# Altium PCB TrabajoTecnologiaCarlos.PcbDoc
Units mm, origin at the board's own origin, x right, y up, seen from the top; angles counter-clockwise.
Board outline 46.58 x 52.42 mm, 2 copper layers (Top Layer, Bottom Layer), stack 1.571 mm thick; 31 components, 35 nets, 105 pads, 0 vias.
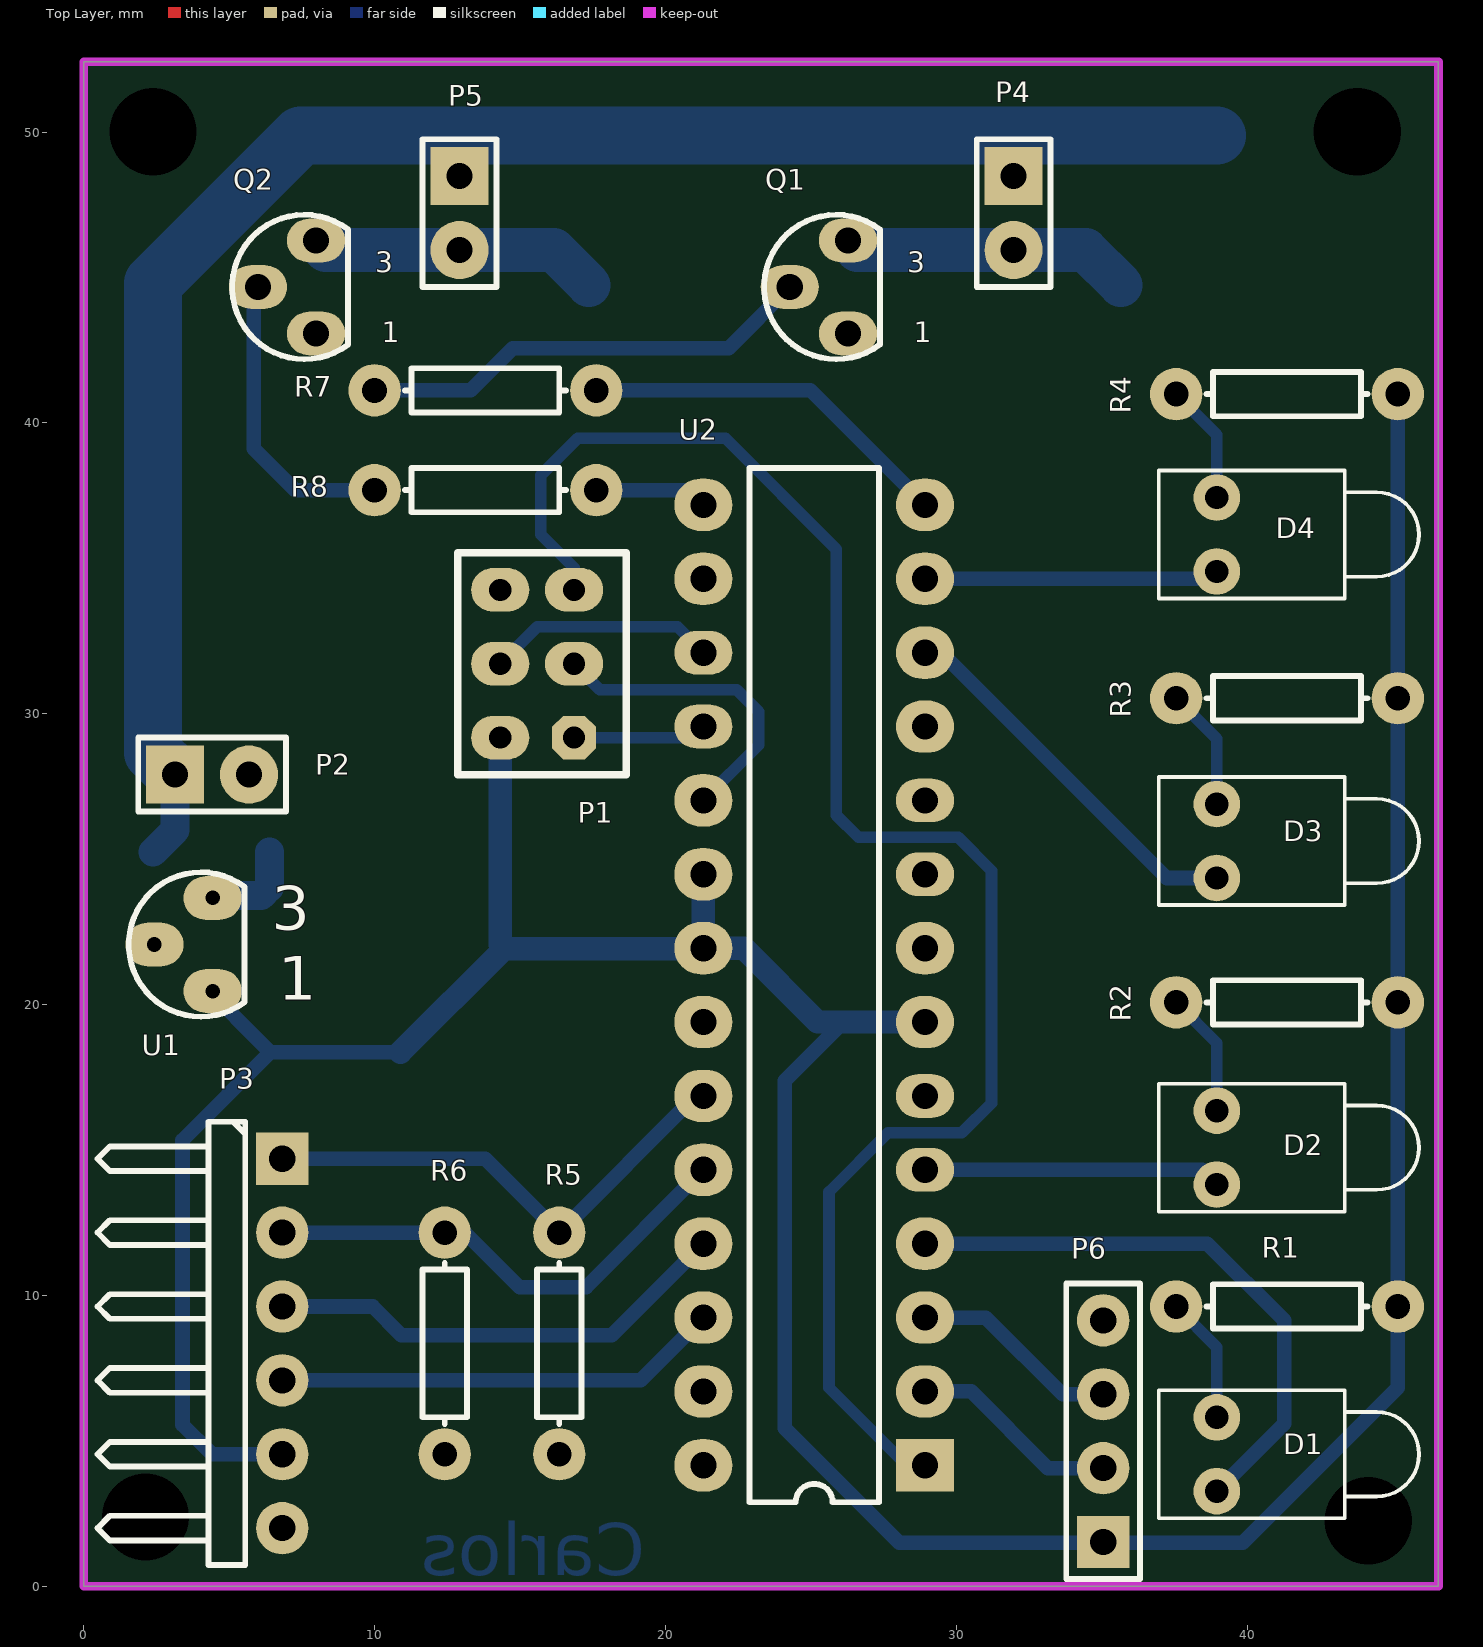
[diagram p0: Top Layer view]
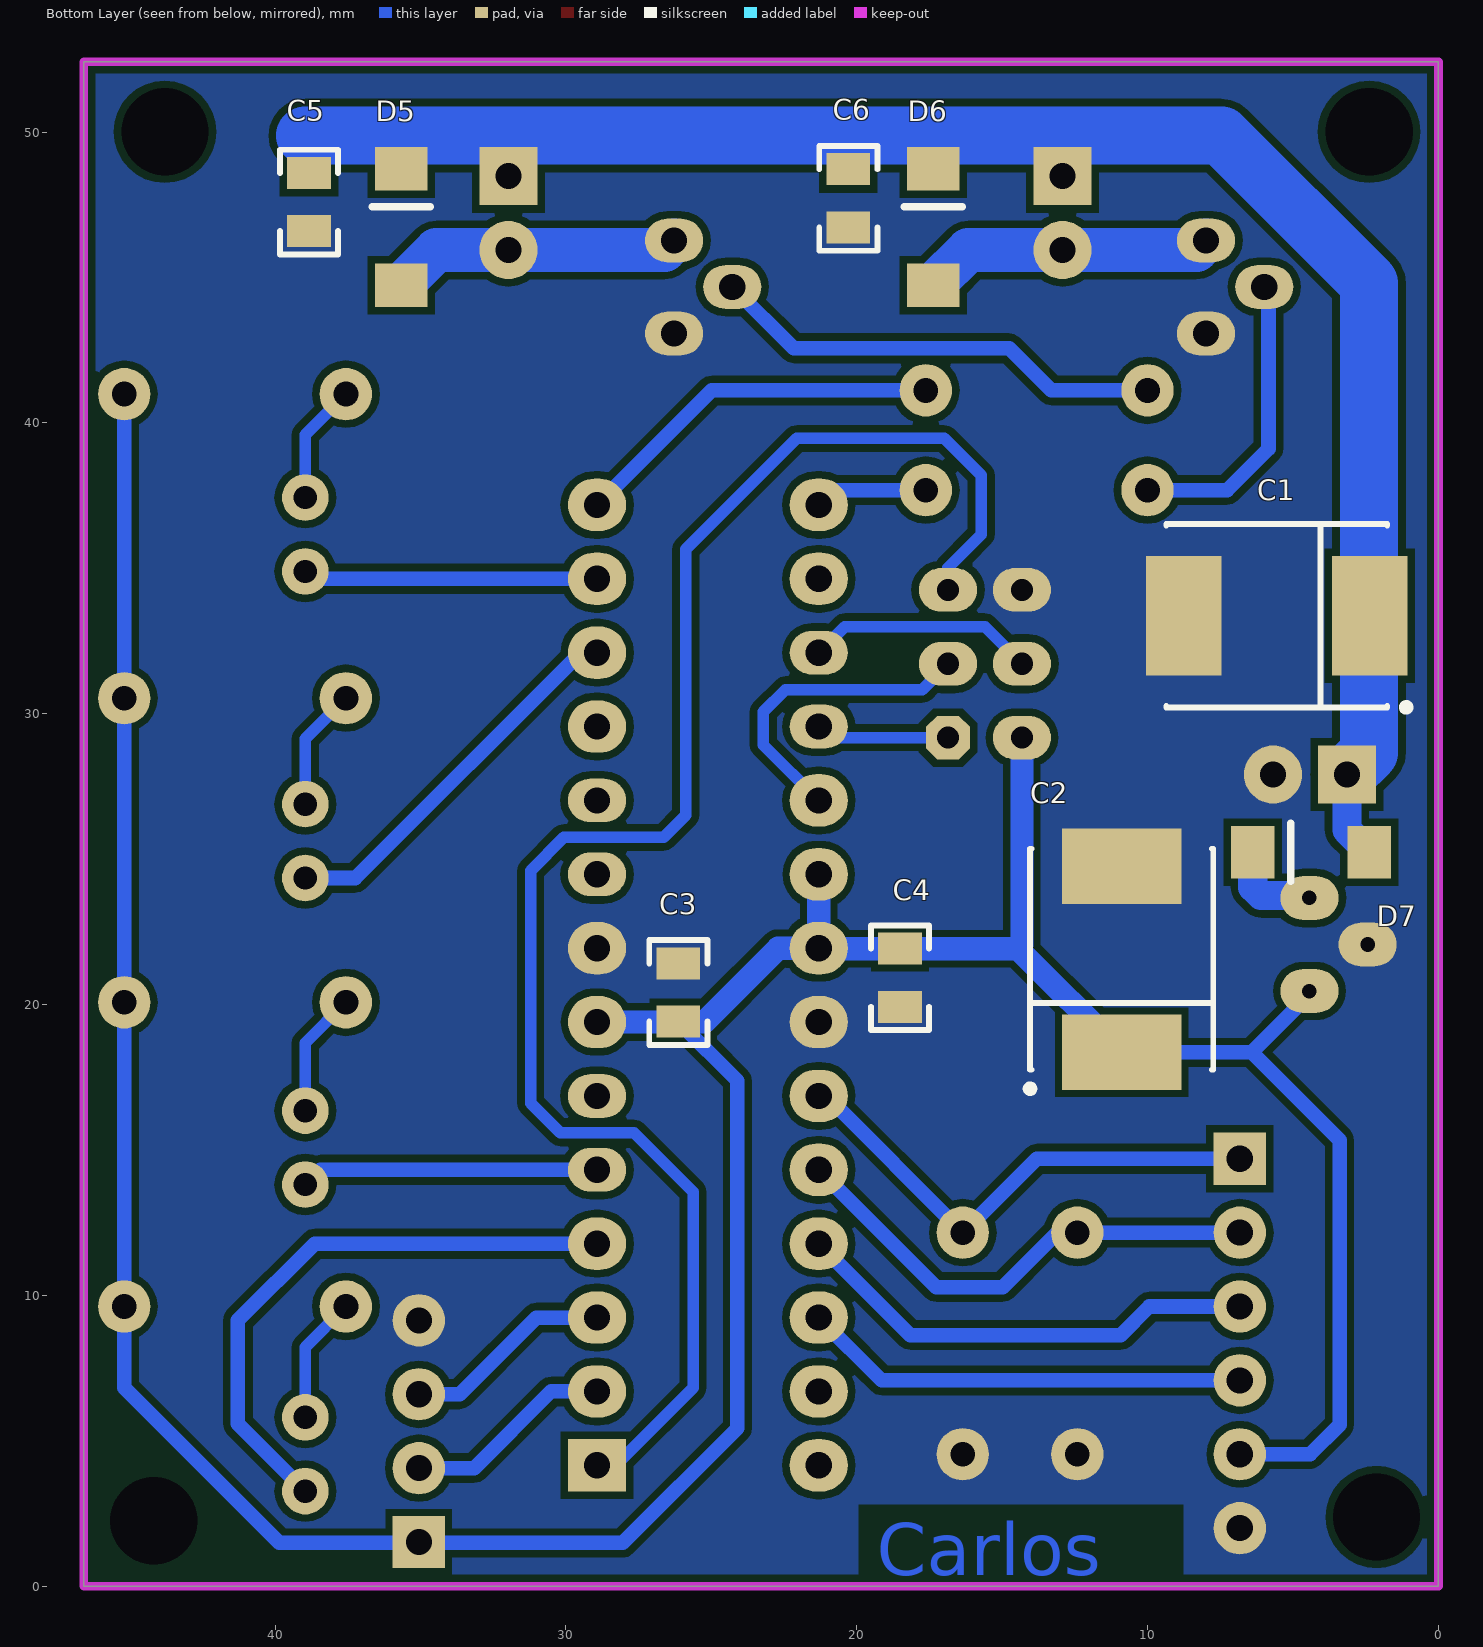
[diagram p1: Bottom Layer view, seen from below]
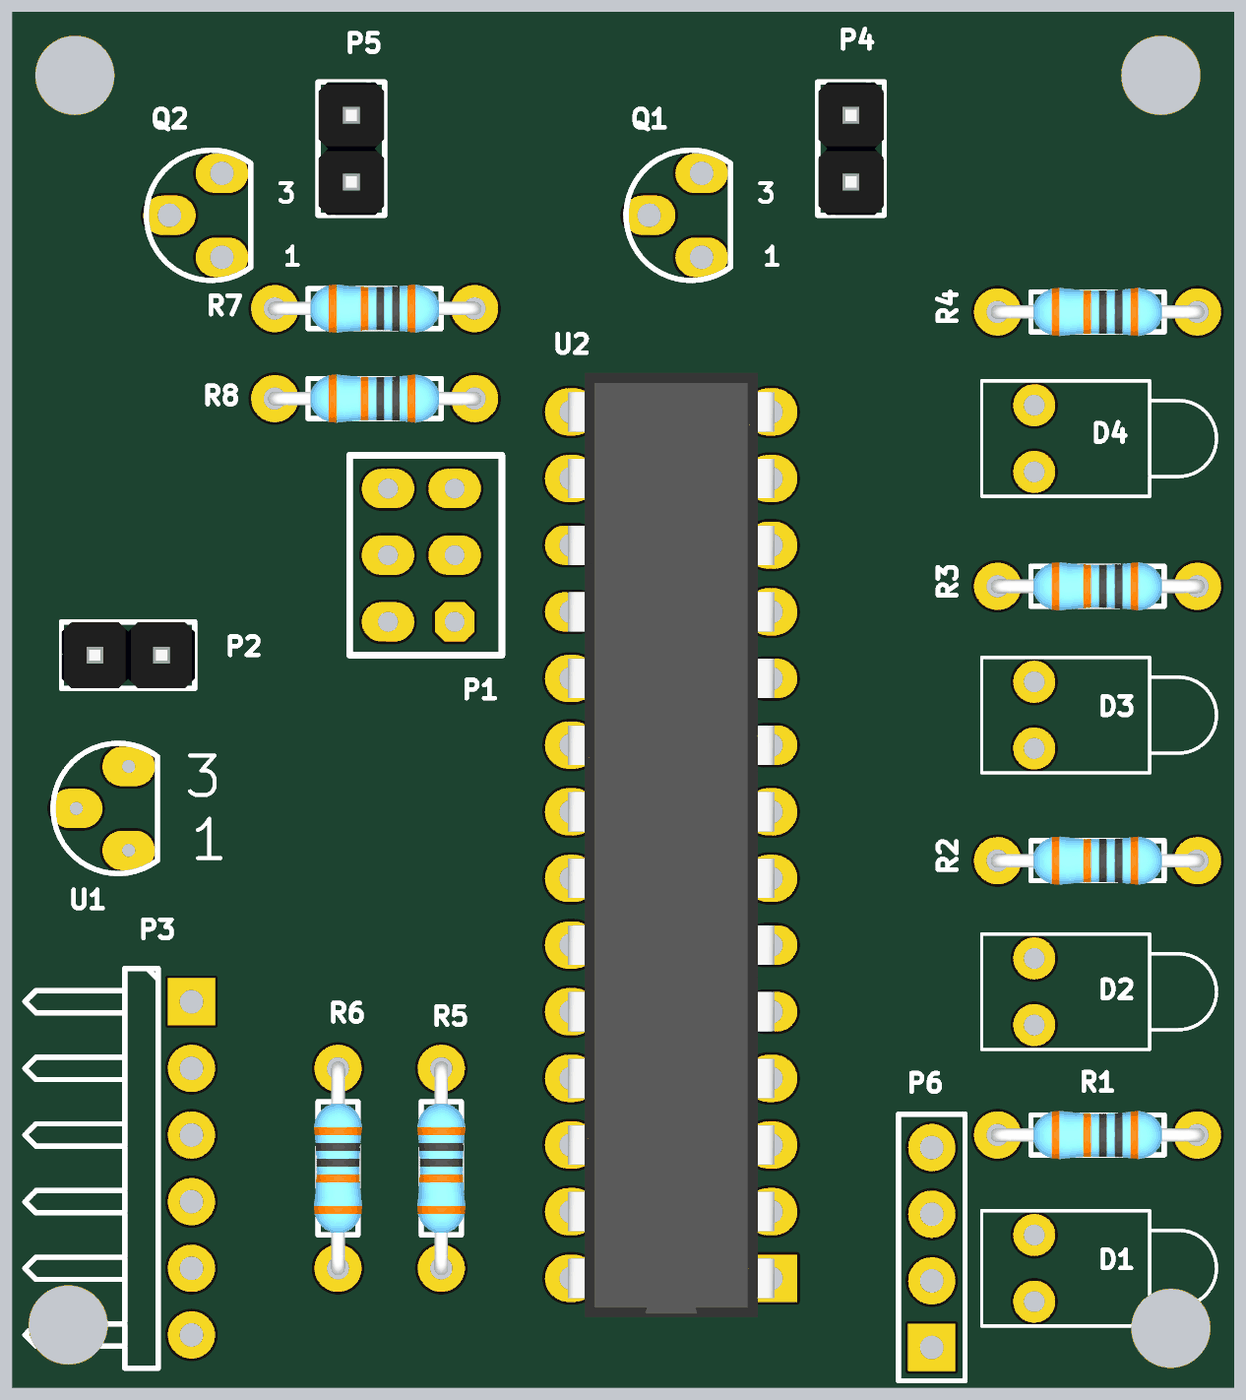
[diagram p2: 3D render of the assembled board from above, using the file's embedded part models]
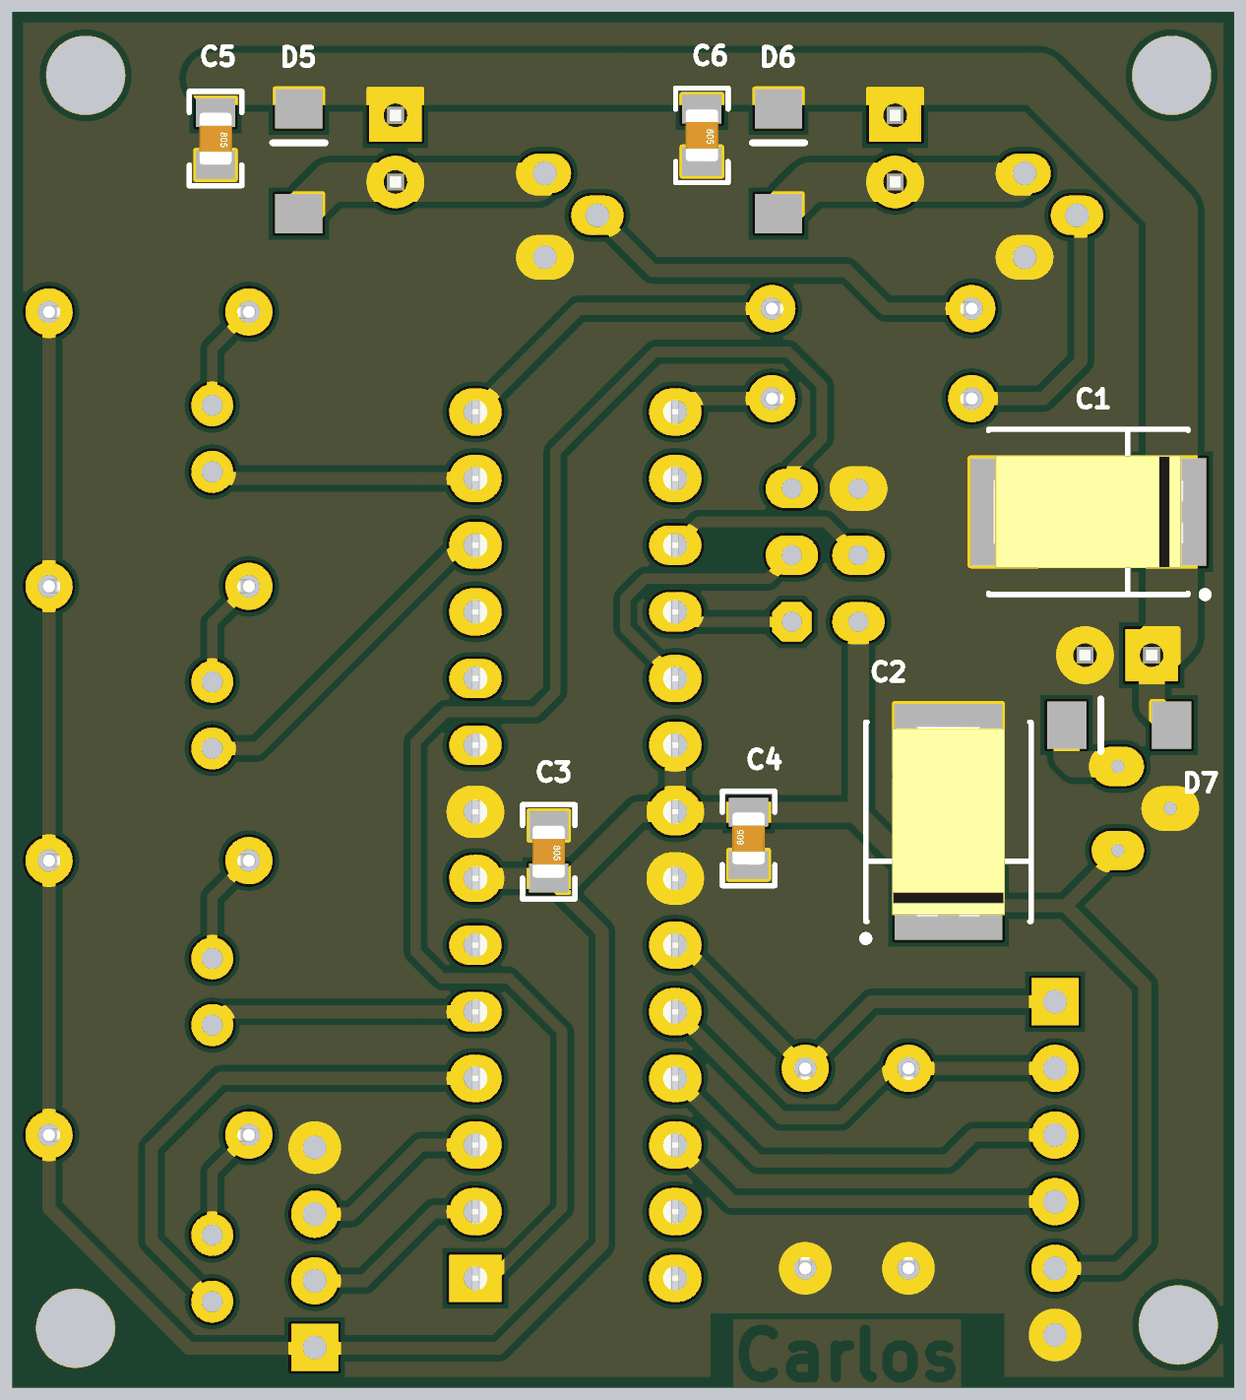
[diagram p3: 3D render of the assembled board from below, using the file's embedded part models]

## Layer stack, top to bottom
Top Layer: signal copper 0.0356
Dielectric: core 1.5, FR-4, Dk 4.8
Bottom Layer: signal copper 0.0356

## Board outline
0,0 0,52.421 46.579,52.421 46.579,0

## Design rules (kind name [scope] priority, off if disabled: settings)
Clearance Clearance_1 [InNamedPolygon('BOTTOMGND')] p1: gap=0.25
Clearance [All] p2: gap=0.3
PlaneConnect [All] p1: planeconnectstyle=Direct reliefexpansion=0.508 reliefentries=4 reliefconductorwidth=0.254 reliefairgap=0.254
PolygonConnect [All] p1: connectstyle=Direct reliefconductorwidth=0.254 reliefentries=4 polygonreliefangle="90 Angle"
RoutingVias [All] p1: holewidth=0.8 width=1 viastyle="Through Hole" minholewidth=0.711 minwidth=1 maxholewidth=2 maxwidth=3
SilkscreenOverComponentPads [All] p1: minsilkscreentomaskgap=0.254
SolderMaskExpansion [All] p1: expansion=0.102
Width [All] p1: maxlimit=3 minlimit=0.2 preferedwidth=0.2
26 further rules are at their usual default settings.

## Components (designator, comment, footprint, x,y, rotation, side; value= is the part's Value field where it differs from the comment)
C1 "Cap Pol2" TC7360-2924 5.558,33.371 r0 bottom
C2 "Cap Pol2" TC7360-2924 10.892,21.56 r90 bottom
C3 "Capacitor" 0805_CAP 26.132,20.417 r270 bottom
C4 "Capacitor" 0805_CAP 18.512,20.925 r90 bottom
C5 "Capacitor" 0805_CAP 38.832,47.595 r270 bottom
C6 "Capacitor" 0805_CAP 20.29,47.722 r270 bottom
D1 "LED1" LED-1 38.959,4.542 r0 top
D2 "LED1" LED-1 38.959,15.083 r0 top
D3 "LED1" LED-1 38.959,25.624 r0 top
D4 "LED1" LED-1 38.959,36.165 r0 top
D5 "1N4148" 1N4148SMD 35.657,44.738 r90 bottom
D6 "1N4148" 1N4148SMD 17.369,44.738 r90 bottom
D7 "1N4148" 1N4148SMD 2.383,25.243 r0 bottom
P1 "ISP" AVR_ISP 15.591,31.72 r180 top
P2 "Header2" Header2Macho 3.145,27.91 r0 top
P3 "Header 6H" HDR1X6H 6.828,14.702 r270 top
P4 "Header2" Header2Macho 31.974,48.484 r270 top
P5 "Header2" Header2Macho 12.924,48.484 r270 top
P6 "Header 4" HDR1X4 35.052,1.524 r90 top
Q1 "BC547" TO92 25.878,44.674 r0 top
Q2 "BC547" TO92 7.59,44.674 r0 top
R1 "Res1" "AXIAL-0.3 3D" 41.372,9.622 r180 top
R2 "Res1" "AXIAL-0.3 3D" 41.372,20.078 r180 top
R3 "Res1" "AXIAL-0.3 3D" 41.372,30.535 r180 top
R4 "Res1" "AXIAL-0.3 3D" 41.372,40.991 r180 top
R5 "Res1" "AXIAL-0.3 3D" 16.353,8.352 r270 top
R6 "Res1" "AXIAL-0.3 3D" 12.416,8.352 r270 top
R7 "Res1" "AXIAL-0.3 3D" 13.813,41.118 r180 top
R8 "Res1" "AXIAL-0.3 3D" 13.813,37.689 r180 top
U1 "L78L05ABZ" TO92V2 4.034,22.068 r0 top
U2 "ATmega8L-8PI" 28P3 25.116,20.671 r90 top

## Footprints (in the part's own frame and the unit in brackets; to place one, negate y for a bottom-side part, rotate by r counter-clockwise, add the part's x,y. Pads: shape width x height; smd on the part's side, far side on the other; paste and mask are expansions set on the pad)
1N4148SMD [mm]
  rect 1.5x1.8 smd: 1(0,0) 2(4,0)
  silkscreen extent 2.7,-1 2.7,1
28P3 [mm] "DIP; 28 Leads; Row Spacing 7.62 mm; Pitch 2.54 mm"
  rect 1.8x2 hole 0.9: 1(-16.51,-3.81)
  oval 1.8x2 hole 0.9: 2(-13.97,-3.81) 3(-11.43,-3.81) 4(-8.89,-3.81) 7(-1.27,-3.81) 8(1.27,-3.81) 11(8.89,-3.81) 12(11.43,-3.81) 13(13.97,-3.81) 14(16.51,-3.81) 15(16.51,3.81) 16(13.97,3.81) 19(6.35,3.81) 20(3.81,3.81) 21(1.27,3.81) 22(-1.27,3.81) 23(-3.81,3.81) 24(-6.35,3.81) 25(-8.89,3.81) 26(-11.43,3.81) 27(-13.97,3.81) 28(-16.51,3.81)
  oval 1.5x2 hole 0.9: 5(-6.35,-3.81) 6(-3.81,-3.81) 9(3.81,-3.81) 10(6.35,-3.81) 17(11.43,3.81) 18(8.89,3.81)
  silkscreen extent -17.78,-2.23 17.78,2.23, body extent -18,-3.94 18,3.94, height 5.08
0805_CAP [mm]
  rect 1.1x1.5 smd: 1(-1,0) 2(1,0)
  silkscreen extent -1.8,-1 1.8,1, body extent -1,-0.62 1,0.63, height 0.78
AVR_ISP [mm]
  oct 1.5x1.5 hole 0.762: 0(-1.27,2.54)
  oval 2x1.5 hole 0.762: 1(1.27,2.54) 2(-1.27,0) 3(1.27,0) 4(-1.27,-2.54) 5(1.27,-2.54)
  silkscreen extent -3.07,-3.81 2.73,3.81, body extent -2.48,-3.79 2.52,3.79, height 8.2
"AXIAL-0.3 3D" [mm]
  round 1.8 hole 0.85: 1(-3.81,0) 2(3.81,0)
  silkscreen extent -2.77,-0.76 2.77,0.76, body extent -4.06,-0.92 4.07,0.92, height 1.92
HDR1X4 [mm] "Connector; Header; 4 Position"
  rect 1.8x1.8 hole 0.9: 1(0,0)
  round 1.8 hole 0.9: 2(2.54,0) 3(5.08,0) 4(7.62,0)
  silkscreen extent -1.27,-1.27 8.89,1.27
HDR1X6H [mm] "Connector; Header; 6 Position; Right Angle"
  rect 1.8x1.8 hole 0.9: 1(0,0)
  round 1.8 hole 0.9: 2(2.54,0) 3(5.08,0) 4(7.62,0) 5(10.16,0) 6(12.7,0)
  silkscreen extent -1.27,-6.35 13.97,-1.27
Header2Macho [mm]
  rect 2x2 hole 0.9: 1(0,0)
  round 2 hole 0.9: 2(2.54,0)
  silkscreen extent -1.27,-1.27 3.81,1.27, body extent -1.27,-1.25 3.81,1.25, height 8.55
LED-1 [mm] "LED; 2 Leads"
  round 1.6 hole 0.8: 1(0,1.27) 2(0,-1.27)
  silkscreen extent -2,-2.2 6.95,2.2
TC7360-2924 [mm] "Capacitor, SM Tantalum; Body 7.3 x 6.0 mm (LxW typ)"
  rect 2.6x4.1 smd: 1(-3.2,0) 2(3.2,0)
  silkscreen extent -4.57,-3.15 3.8,3.27, body extent -3.65,-2.15 3.65,2.15, height 4.11
TO92 [mm] "TO, Flat Index; 3 In-Line, Axial Leads; Body Dia. 4.5mm; Leads 0.51 x 0.48 mm (max)"
  oval 2x1.5 hole 0.9: 1(0.4,-1.6) 2(-1.6,0) 3(0.4,1.6)
  silkscreen extent -2.48,-2.48 1.5,2.48
TO92V2 [mm] "TO, Flat Index; 3 In-Line, Axial Leads; Body Dia. 4.5mm; Leads 0.51 x 0.48 mm (max)"
  oval 2x1.5 hole 0.5: 1(0.4,-1.6) 2(-1.6,0) 3(0.4,1.6)
  silkscreen extent -2.48,-2.48 1.5,2.48

## Part data
C1 C2: "Polarized Capacitor (Axial)"
C3 C4 C5 C6: library part Cap
D1 D2 D3 D4: "Typical RED GaAs LED"
P1: library part AVR_ISP
P3: "Header, 6-Pin, Right Angle"
P6: "Header, 4-Pin"
R1 R2 R3 R4 R5 R6 R7 R8: "Resistor"
U1: "Positive Voltage Regulator"
U2: "8-Bit AVR Microcontroller with 8K Bytes of In-System Programmable Flash Memory"

## Free pads (board coordinates)
  rrect50% 1x2 hole 3: 0(2.383,50.008)
  oval 1x2 hole 3: 1(43.785,50.008) 2(44.166,2.256) 3(2.129,2.383)

## Nets (pads, with @x,y where several pads share a name; then routed paths per layer and width w, separated by ;. In a path a pad name is that pad's centre, name@x,y a point inside that pad or via, vN(x,y) a via of type N, cw(c..) or ccw(c..) an arc to the next point about the centre after c; other vN are vias at no path point)
GND: C1.2 C2.2 C3.1 C4.1 C5.2 C6.2 P1.5 P2.2 P3.6 P6.4 Q1.1 Q2.1 R5.2 R6.2 U1.2 U2.8 U2.22
MISO: P1.0 U2.18 | length 4.6
  Bottom Layer w0.4: P1.0 20.925,29.18 U2.18
MOSI: P1.3 U2.17 | length 7.9
  Bottom Layer w0.4: P1.3 15.591,32.99 20.417,32.99 U2.17
NetD1_1: D1.1 R1.2 | length 4.4
  Bottom Layer w0.4: R1.2 38.959,8.225 D1.1
NetD2_1: D2.1 R2.2 | length 4.3
  Bottom Layer w0.4: R2.2 38.959,18.681 D2.1
NetD3_1: D3.1 R3.2 | length 4.2
  Bottom Layer w0.4: R3.2 38.959,29.138 D3.1
NetD4_1: D4.1 R4.2 | length 4.1
  Bottom Layer w0.4: R4.2 38.959,39.594 D4.1
NetD5_1: D5.1 P4.2 Q1.3 | length 10
  Bottom Layer w1.5: Q1.3 26.608,45.944 P4.2 34.451,45.944 D5.1
NetD6_1: D6.1 P5.2 Q2.3 | length 10
  Bottom Layer w1.5: Q2.3 8.32,45.944 P5.2 16.163,45.944 D6.1
NetD7_2: D7.2 U1.3 | length 3.3
  Bottom Layer w1: U1.3@4.445,23.749 6.096,23.749 6.383,24.036 D7.2
NetQ1_2: Q1.2 R7.2 | length 15.7
  Bottom Layer w0.5: R7.2 13.305,41.118 14.755,42.568 22.172,42.568 Q1.2
NetQ2_2: Q2.2 R8.2 | length 10.4
  Bottom Layer w0.5: Q2.2 5.842,44.526 5.842,39.116 7.269,37.689 R8.2
PB0: R7.1 U2.14 | length 12.9
  Bottom Layer w0.5: R7.1 24.989,41.118 U2.14
PB1: R8.1 U2.15 | length 3.9
  Bottom Layer w0.5: R8.1 20.798,37.689 U2.15
PB2: U2.16
PB6: U2.9
PB7: U2.10
PC0: P3.1 R5.1 U2.23 | length 17.5
  Bottom Layer w0.5: P3.1 13.813,14.702 R5.1 21.052,16.861 U2.23
PC1: P3.2 R6.1 U2.24 | length 16.9
  Bottom Layer w0.5: P3.2 R6.1 13.111,12.162 14.986,10.287 17.272,10.287 U2.24
PC2: P3.3 U2.25 | length 16.2
  Bottom Layer w0.5: P3.3 9.936,9.622 10.922,8.636 18.161,8.636 U2.25
PC3: P3.4 U2.26 | length 15.4
  Bottom Layer w0.5: P3.4 19.147,7.082 U2.26
PC4: U2.27
PC5: U2.28
PD0: P6.2 U2.2 | length 7.2
  Bottom Layer w0.5: U2.2 30.51,6.701 33.147,4.064 P6.2
PD1: P6.3 U2.3 | length 7.2
  Bottom Layer w0.5: U2.3 31.018,9.241 33.655,6.604 P6.3
PD2: D1.2 U2.4 | length 20.3
  Bottom Layer w0.5: U2.4 38.638,11.781 41.275,9.144 41.275,5.588 D1.2
PD3: D2.2 U2.5 | length 10.2
  Bottom Layer w0.5: U2.5 38.451,14.321 D2.2
PD4: U2.6
PD5: U2.11
PD6: D3.2 U2.12 | length 13.2
  Bottom Layer w0.5: U2.12 29.494,32.101 37.241,24.354 D3.2
PD7: D4.2 U2.13 | length 10.1
  Bottom Layer w0.5: U2.13 38.705,34.641 D4.2
R\E\S\E\T\: P1.4 U2.1 | length 57.9
  Bottom Layer w0.4: P1.4 16.861,35.022 15.718,36.165 15.718,38.197 16.988,39.467 22.068,39.467 25.878,35.657 25.878,26.513 26.64,25.751 30.069,25.751 31.212,24.608 31.212,16.607 30.196,15.591 27.656,15.591 25.624,13.559 25.624,6.828 28.291,4.161 U2.1
SCK: P1.2 U2.19 | length 10.9
  Bottom Layer w0.4: P1.2 17.75,30.831 22.449,30.831 23.211,30.069 23.211,28.926 U2.19
VCC: C2.1 C3.2 C4.2 P1.1 P3.5 P6.1 R1.1 R2.1 R3.1 R4.1 U1.1 U2.7 U2.20 U2.21 | length 130.1
  Bottom Layer w0.5: U1.1@4.034,20.798 4.034,20.748 6.422,18.36 ; P3.5 4.415,4.542 3.399,5.558 3.399,15.337 6.422,18.36 ; C2.1 6.422,18.36 ; C3.2 26.116,19.401 24.1,17.385 24.1,5.431 28.037,1.494 39.848,1.494 45.182,6.828 R1.1 R2.1 R3.1 R4.1
  Bottom Layer w0.8: C2.1 14.457,21.925 ; P1.1 14.321,22.061 14.457,21.925 ; U2.20 U2.21 ; U2.7 26.116,19.401 25.243,19.401 22.703,21.941 U2.21 ; 14.457,21.925 C4.2 21.29,21.925 U2.21
VIN: C1.1 C5.1 C6.1 D5.2 D6.2 D7.1 P2.1 P4.1 P5.1 | length 58.9
  Bottom Layer w1: D7.1 3.145,26.005 P2.1
  Bottom Layer w2: P2.1 2.383,28.672 2.383,44.801 7.463,49.881 31.974,49.881 38.959,49.881

## Polygon pours and split planes (outlines as drawn)
GND on Bottom Layer "BOTTOMGND" (solid, remove dead copper, pour order 2): 0,0 0,52.421 46.579,52.421 46.579,0

## Keep-outs
Keep-Out Layer:
  the board outline again, w0.3

## Other copper
Bottom Layer:
  text "Carlos" at 19.304,0.381 h1.8

## Dimensions
0,0 to 46.579,0 on Mechanical 1
0,0 to 0,52.421 on Mechanical 1

## Text inside footprints (layer, text, board x,y; h text height)
Q1: Top Overlay "1" at 28.538,42.774 h0.7; Top Overlay "3" at 28.308,45.184 h0.7
Q2: Top Overlay "1" at 10.25,42.774 h0.7; Top Overlay "3" at 10.02,45.184 h0.7
U1: Top Overlay "3" at 6.464,22.578 h1.5; Top Overlay "1" at 6.694,20.168 h1.5